# Altium PCB pcb-rev1-env.PcbDoc (part 1 of 2)
Units mm, origin at the board's own origin, x right, y up, seen from the top; angles counter-clockwise.
Board outline 100 x 50 mm, 2 copper layers (Top Layer, Bottom Layer); 97 components, 95 nets, 368 pads, 249 vias.
Unrouted connection lines stored in the file: 77.
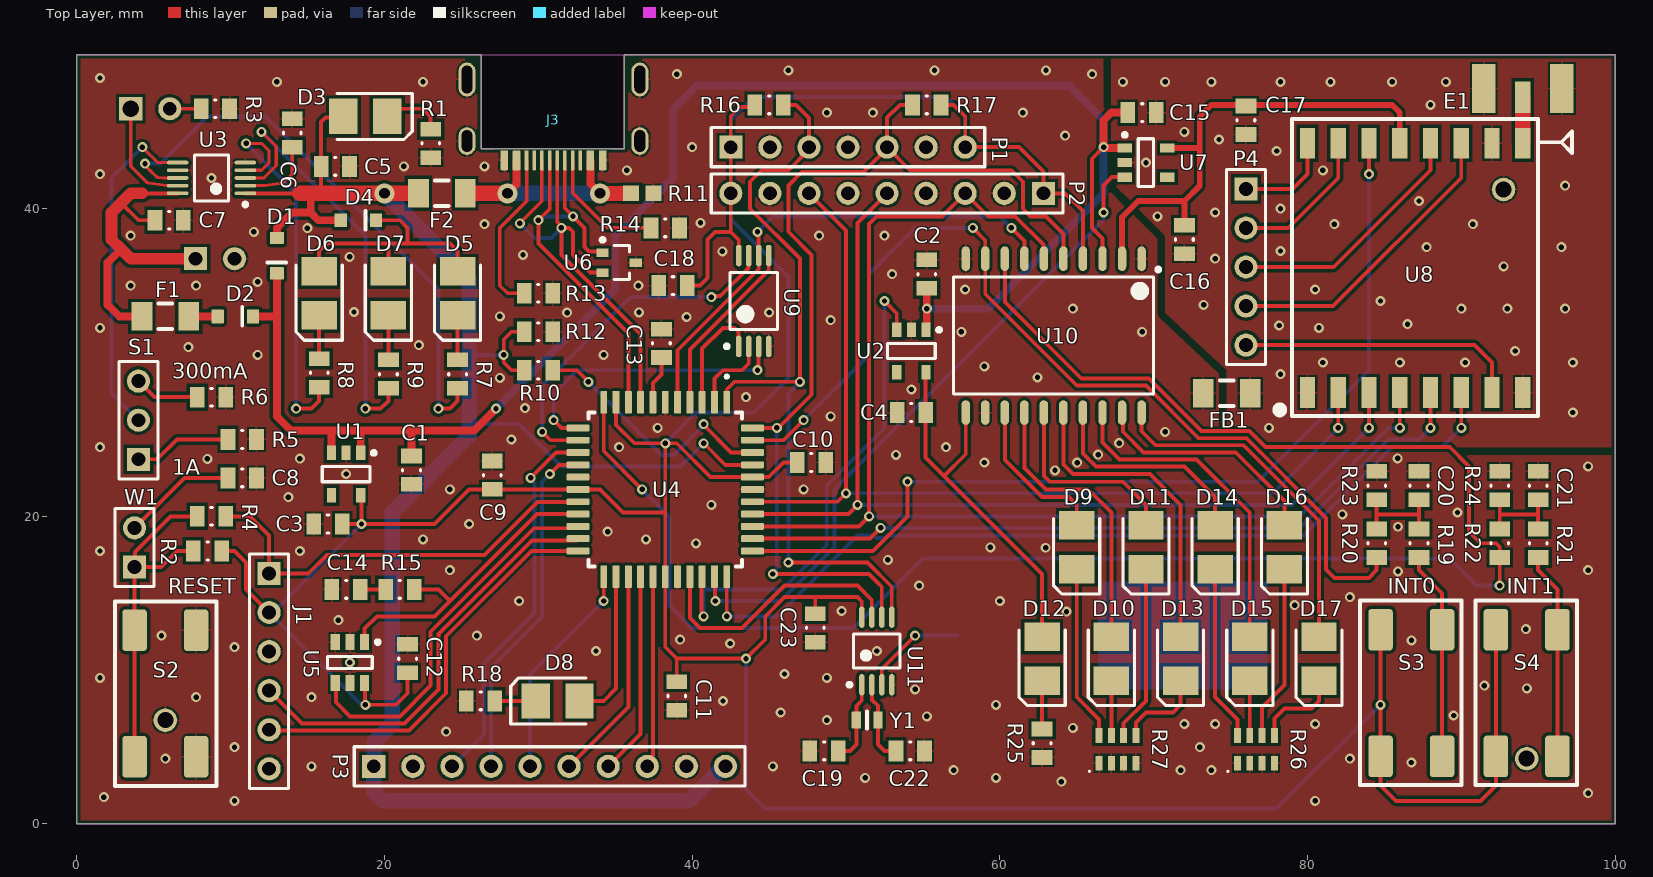
[diagram p0: Top Layer view]
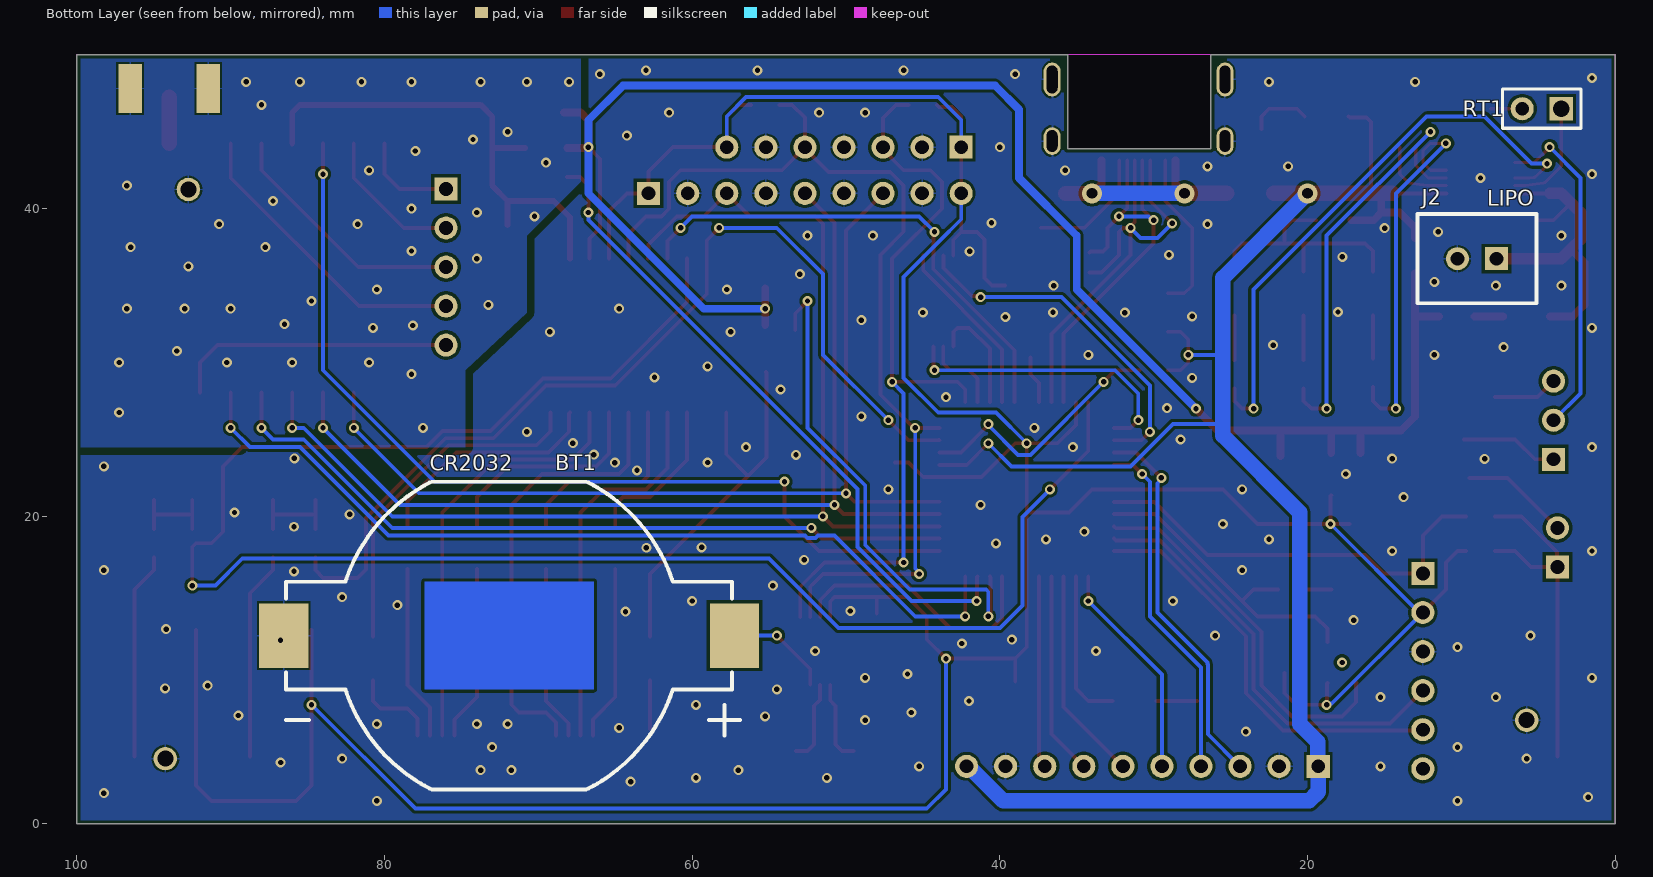
[diagram p1: Bottom Layer view, seen from below]

## Layer stack, top to bottom
Top Solder: solder mask 0.0102, Solder Resist, Dk 3.5
Top Layer: signal copper 0.0356
Dielectric 1: dielectric 0.32, FR-4, Dk 4.8
Bottom Layer: signal copper 0.0356
Bottom Solder: solder mask 0.0102, Solder Resist, Dk 3.5

## Board outline
0,0 0,50 26.3,50 26.3,43.9 35.6,43.9 35.6,50 100,50 100,0

## Design rules (kind name [scope] priority, off if disabled: settings)
BoardOutlineClearance [All] p1: gap=0.254 ignorepadtopadclearanceinfootprint=FALSE
Clearance "GND PLANE" [InNet('GND') vs InNet('SIG')] p1: gap=0.508 ignorepadtopadclearanceinfootprint=TRUE
Clearance [All] p2: gap=0.203 ignorepadtopadclearanceinfootprint=TRUE except(0.279: Arc-Hole Track-Hole SMDPad-Hole THPad-Hole Via-Hole Fill-Hole Poly-Hole Region-Hole Text-Hole)
ComponentClearance [All] p1: gap=0.127 collisioncheckmode=3 verticalgap=0.127 showdistances=TRUE
DiffPairsRouting [All] p1: maxlimit=0.254 minlimit=0.127 mostfreqgap=0.127 toplayer_minwidth=0.127 toplayer_maxwidth=25.4 toplayer_prefwidth=0.127 bottomlayer_minwidth=0.127 bottomlayer_maxwidth=25.4 bottomlayer_prefwidth=0.127 maxuncoupledlength=12.7
Height [All] p1: minheight=0 maxheight=1816.048 prefheight=12.7
HoleSize [All] p1: absolutevalues=TRUE maxlimit=6.1 minlimit=0.3 maxpercent=80.000 minpercent=20.000
HoleToHoleClearance [All] p1: gap=0.6 allowstackedmicrovias=FALSE
MinimumAnnularRing VIaAnnularRing [IsVia] p1: minimumring=0.145
MinimumAnnularRing [All] p2: minimumring=0.18
PlaneClearance [All] p1: clearance=0.127
PlaneConnect PlaneConnectPowerPads [InPadClass('PowerPads')] p1: planeconnectstyle=Direct reliefexpansion=0.508 reliefentries=4 reliefconductorwidth=0.254 reliefairgap=0.254
PlaneConnect [All] p2: pad.planeconnectstyle=Relief pad.reliefexpansion=0.3 pad.reliefentries=4 pad.reliefconductorwidth=0.127 pad.reliefairgap=0.127 via.planeconnectstyle=Direct via.reliefexpansion=0.3 via.reliefentries=4 via.reliefconductorwidth=0.127 via.reliefairgap=0.127
PolygonConnect PolygonConnectPowerPads [All vs (InPadClass('PowerPads'))] p1: connectstyle=Direct reliefconductorwidth=0.254 reliefentries=4 polygonreliefangle="90 Angle" airgapwidth=0.254
PolygonConnect [All] p2: thpad.connectstyle=Relief thpad.reliefconductorwidth=0.127 thpad.reliefentries=4 thpad.polygonreliefangle="90 Angle" thpad.airgapwidth=0.127 smdpad.connectstyle=Relief smdpad.reliefconductorwidth=0.127 smdpad.reliefentries=4 smdpad.polygonreliefangle="90 Angle" smdpad.airgapwidth=0.127 via.connectstyle=Direct via.reliefconductorwidth=0.127 via.reliefentries=4 via.polygonreliefangle="90 Angle" via.airgapwidth=0.127
RoomDefinition EnviroMon-p1 [InComponentClass('EnviroMon-p1')] p1: confinementstyle=ConfineIn formatcopy=TRUE lockcomponents=FALSE outline -2.593,-3.533 225.905,-3.533 225.905,52.779 -2.593,52.779
RoutingVias [All] p1: holewidth=0.35 width=0.65 viastyle="Through Hole" minholewidth=0.35 minwidth=0.65 maxholewidth=2 maxwidth=2
SilkToSilkClearance [All] p1: silktosilkclearance=0
SilkToSolderMaskClearance [IsPad] p1: minsilkscreentomaskgap=0.16 clearancetoexposedcopper=TRUE
SolderMaskExpansion [All] p1: expansion=0.075 istentingtop=FALSE
UnRoutedNet [All] p1: checkbadconnections=TRUE
Width [All] p1: maxlimit=25.4 minlimit=0.203 preferedwidth=0.254 minimp=50.000000 maximp=50.000000 favimp=50.000000
20 further rules are at their usual default settings.

## Classes and differential pairs
component class EnviroMon-p1: BT1 C1 C2 C3 C4 C5 C6 C7 C8 C9 C10 C11 C13 C14 C15 C17 C19 C20 C21 C22 C23 C? D1 D2 D3 D4 D5 D6 D7 D8 D9 D10 D11 D12 D13 D14 D15 D16 D17 E1 F1 F2 F? FB1 FB? J1 J2 J3 P1 P3 P4 R1 R3 R7 R9 R10 R11 R12 R13 R14 R15 R16 R18 R23 R24 R25 R26 R27 R? RT1 S1 S2 S3 S4 U1 U2 U3 U4 U6 U7 U8 U9 U10 U11 U? W1 Y1

## Components (designator, comment, footprint, x,y, rotation, side; value= is the part's Value field where it differs from the comment)
BT1 "BU2032SM-HD-G" BAT_BU2032SM-HD-G 71.9,12.25 r0 bottom locked
C1 "Cap" 0805 21.75,23 r90 top locked value=1u
C2 "Cap" 0805 55.25,35.75 r270 top locked value=1u
C3 "Cap" 0805 16.325,19.5 r0 top locked value=1u
C4 "Cap" 0805 54.25,26.75 r0 top locked value=1u
C5 "Cap" 0805 16.8,42.75 r180 top locked value=4.7u
C6 "Cap" 0805 14,44.925 r270 top locked value=4.7u
C7 "Cap" 0805 6,39.25 r180 top locked value=4.7u
C8 "Cap" 0805 10.75,22.5 r180 top locked value=0.1u
C9 "Cap" 0805 27,22.675 r90 top locked value=0.1u
C10 "Cap" 0805 47.75,23.5 r0 top locked value=0.1u
C11 "Cap" 0805 39,8.325 r90 top locked value=0.1u
C12 "Cap" 0805 21.5,10.75 r90 top locked value=2.2u
C13 "Cap" 0805 38,31.25 r270 top locked value=10u
C14 "Cap" 0805 17.5,15.25 r180 top locked value=2.2u
C15 "Cap" 0805 69.25,46.25 r180 top locked value=1u
C16 "Cap" 0805 72,38 r90 top locked value=1u
C17 "Cap" 0805 76,45.75 r90 top locked value=10u
C18 "Cap" 0805 38.75,35 r0 top locked value=0.1u
C19 "Cap" 0805 48.575,4.75 r0 top locked value=???
C20 "Cap" 0805 87.25,22 r90 top locked value=10n
C21 "Cap" 0805 95,22 r90 top locked value=10n
C22 "Cap" 0805 54.175,4.75 r180 top locked value=???
C23 "Cap" 0805 48,12.75 r90 top locked value=0.1u
D1 "Schottky Diode" "DIODE SOD323" 13,37 r90 top locked
D2 "Schottky Diode" "DIODE SOD323" 10.25,33 r180 top locked
D3 "CYN" "LED PLCC2" 18.75,46 r0 top locked
D4 "Schottky Diode" "DIODE SOD323" 18.25,39.25 r180 top locked
D5 "CYN" "LED PLCC2" 24.75,34.5 r270 top locked
D6 "GRN" "LED PLCC2" 15.75,34.5 r270 top locked
D7 "ORN" "LED PLCC2" 20.25,34.5 r270 top locked
D8 "RED" "LED PLCC2" 31.25,8 r180 top locked
D9 "RED" "LED PLCC2" 65,18 r270 top locked
D10 "RED" "LED PLCC2" 67.25,10.75 r270 top locked
D11 "RED" "LED PLCC2" 69.5,18 r270 top locked
D12 "RED" "LED PLCC2" 62.75,10.75 r270 top locked
D13 "RED" "LED PLCC2" 71.75,10.75 r270 top locked
D14 "RED" "LED PLCC2" 74,18 r270 top locked
D15 "RED" "LED PLCC2" 76.25,10.75 r270 top locked
D16 "RED" "LED PLCC2" 78.5,18 r270 top locked
D17 "RED" "LED PLCC2" 80.75,10.75 r270 top locked
E1 "SMA connector" SMA 94.02,48.746 r0 top locked
F1 "0.5A Fuse" 1206 5.75,33 r0 top locked
F2 "1.5A Fuse" 1206 23.725,41 r0 top locked
FB1 "Ferrite Bead" 1206 74.75,28 r0 top locked
J1 "ICSP" HDR1X6 12.5,16.29 r270 top locked
J2 "JST-PH" JST-PH 7.71,36.75 r0 bottom locked
J3 "USB C Receptable" USB4510-03-1-A 30.98,50 r180 top locked
P1 "Header 7" HDR1X7 42.51,44 r0 top locked
P2 "Header 9" HDR1X9 62.83,41 r180 top locked
P3 "Header 10" HDR1X10 19.3,3.75 r0 top locked
P4 "Header 5" HDR1X5 76,41.29 r270 top locked
R1 "Res1" 0805 23,44.25 r270 top locked value=1k
R2 "Res1" 0805 8.5,17.75 r0 top locked value=10k
R3 "Res1" 0805 9,46.5 r180 top locked value=???
R4 "Res1" 0805 8.75,20 r180 top locked value=470
R5 "Res1" 0805 10.75,25 r0 top locked value=1k
R6 "Res1" 0805 8.75,27.75 r0 top locked value=3.3k
R7 "Res1" 0805 24.75,29.25 r90 top locked value=1k
R8 "Res1" 0805 15.75,29.325 r90 top locked value=1k
R9 "Res1" 0805 20.25,29.25 r90 top locked value=1k
R10 "Res1" 0805 30,29.5 r180 top locked value=100k
R11 "Varistor" 0603 36.75,41 r0 top locked
R12 "Res1" 0805 30,32 r0 top locked value=100k
R13 "Res1" 0805 30,34.5 r0 top locked value=5.1k
R14 "Res1" 0805 38.25,38.75 r180 top locked value=5.1k
R15 "Res1" 0805 21,15.25 r0 top locked value=50
R16 "Res1" 0805 45,46.75 r0 top locked value=4.7k
R17 "Res1" 0805 55.25,46.75 r180 top locked value=4.7k
R18 "Res1" 0805 26.25,8 r0 top locked value=???
R19 "Res1" 0805 87.25,18.25 r270 top locked value=???
R20 "Res1" 0805 84.5,18.25 r270 top locked value=???
R21 "Res1" 0805 95,18.25 r270 top locked value=???
R22 "Res1" 0805 92.5,18.25 r90 top locked value=???
R23 "Res1" 0805 84.5,22 r90 top locked value=75k
R24 "Res1" 0805 92.5,22 r90 top locked value=75k
R25 "Res1" 0805 62.75,5.25 r90 top locked value=???
R26 "Res1" "1206 ARRAY" 76.65,4.85 r90 top locked value=1k
R27 "Res1" "1206 ARRAY" 67.65,4.85 r90 top locked value=1k
RT1 "Thermistor" HDR1X2#1 3.5,46.5 r0 bottom locked
S1 "SW-SPDT" HDR1X3 4,23.71 r90 top locked
S2 "SW-PB" "SM KT SWITCH" 5.75,8.5 r270 top locked
S3 "SW-PB" "SM KT SWITCH" 86.75,8.5 r90 top locked
S4 "SW-PB" "SM KT SWITCH" 94.25,8.5 r90 top locked
U1 "2.8V Regulator" "REGULATOR SOT25(3?)" 17.5,22.75 r270 top locked
U2 "2.8V Regulator" "REGULATOR SOT25(3?)" 54.25,30.75 r270 top locked
U3 "LiPo Charge Controller" "LIPO MSOP" 8.75,42 r180 top locked
U4 "Main Microcontroller" PIC24FJ64GB004T-I/PT 38.25,21.75 r270 top locked
U5 "Precision Voltage Reference" "VREF SOT23-6" 17.75,10.5 r270 top locked
U6 "TVS Diode" "TVS SOT23-3" 35.25,36.5 r0 top locked
U7 "2.8V Regulator" "REGULATOR SOT25(3?)" 69.5,43 r0 top locked
U8 "RFM95 Transceiver" RFM95 87.4,36.223 r90 top locked
U9 "512kb EEPROM" "EEPROM 8TSSOP" 44,34 r90 top locked
U10 "Octal Buffer" "OCTAL BUFFER SOIC" 63.5,31.75 r270 top locked
U11 "RTC" "RTC 8MSOP" 52,11.25 r90 top locked
W1 "Jumper" HDR1X2#2 3.75,16.71 r90 top locked
Y1 "32.768kHz" CRYSTAL 51.373,6.759 r180 top locked

## Footprints (in the part's own frame and the unit in brackets; to place one, negate y for a bottom-side part, rotate by r counter-clockwise, add the part's x,y. Pads: shape width x height; smd on the part's side, far side on the other; paste and mask are expansions set on the pad)
0603 [mm]
  rect 1.05x1 smd: 1(-0.725,0) 2(0.725,0)
  body extent -0.9,-0.5 0.9,0.5, height 1
0805 [mm] "Chip Resistor, 2-Leads, Body 2.00x1.25mm, IPC Medium Density"
  rect 0.95x1.35 smd: 1(-0.925,0) 2(0.925,0)
  silkscreen extent -0.05,-0.58 0.05,0.58, body extent -1.05,-0.67 1.05,0.67, height 0.65
1206 [mm] "Chip Resistor, 2-Leads, Body 3.10x1.60mm, IPC Low Density"
  rect 1.35x1.85 smd: 1(-1.525,0) 2(1.525,0)
  silkscreen extent -0.45,-0.82 0.45,0.82, body extent -1.6,-0.85 1.6,0.85, height 0.65
"1206 ARRAY" [mm] "Chip Array, Flat, 8-Leads, Pitch 0.80mm,  Body 3.20x1.60mm,  IPC Medium Density"
  rect 0.95x0.45 smd: 1(-0.9,1.2) 2(-0.9,0.4) 3(-0.9,-0.4) 4(-0.9,-1.2) 5(0.9,-1.2) 6(0.9,-0.4) 7(0.9,0.4) 8(0.9,1.2)
  silkscreen extent -1.47,1.78 -1.37,1.88, body extent -0.9,-1.68 0.9,1.68, height 1
BAT_BU2032SM-HD-G [mm]
  rect 3.2x4.2 smd: NEG(14.65,0) POS(-14.65,0)
  Top Layer region: 5.5,-3.5 -5.5,-3.5 -5.5,3.5 5.5,3.5
  silkscreen extent -15,-10 14.5,10
CRYSTAL [mm]
  rrect10% 0.6x1.1 smd: 1(-0.7,0) 2(0.7,0)
  silkscreen extent 0,-0.55 0,0.55
"DIODE SOD323" [mm]
  rrect10% 0.8x0.9 smd: 1(-1.2,0) 2(1.1,0)
  silkscreen extent -0.5,-0.6 -0.5,0.6
"EEPROM 8TSSOP" [mm]
  oval 1.4x0.38 smd: 1(-2.95,0.975) 2(-2.95,0.325) 3(-2.95,-0.325) 4(-2.95,-0.975) 5(2.95,-0.975) 6(2.95,-0.325) 7(2.95,0.325) 8(2.95,0.975)
  silkscreen extent -3.07,-1.55 1.85,1.87, body extent -2.25,-1.55 2.25,1.55, height 1.2
HDR1X2#1 [mm] "Connector; Header; 2 Position"
  rect 1.5x1.5 hole 1.05: 1(0,0)
  round 1.5 hole 0.9: 2(2.54,0)
  silkscreen extent -1.27,-1.27 3.81,1.27
HDR1X2#2 [mm] "Connector; Header; 2 Position"
  rect 1.5x1.5 hole 0.9: 1(0,0)
  round 1.5 hole 0.9: 2(2.54,0)
  silkscreen extent -1.27,-1.27 3.81,1.27
HDR1X3 [mm] "Connector; Header; 3 Position"
  rect 1.5x1.5 hole 0.9: 1(0,0)
  round 1.5 hole 0.9: 2(2.54,0) 3(5.08,0)
  silkscreen extent -1.27,-1.27 6.35,1.27
HDR1X5 [mm] "Connector; Header; 5 Position"
  rect 1.5x1.5 hole 0.9: 1(0,0)
  round 1.5 hole 0.9: 2(2.54,0) 3(5.08,0) 4(7.62,0) 5(10.16,0)
  silkscreen extent -1.27,-1.27 11.43,1.27
HDR1X6 [mm] "Connector; Header; 6 Position"
  rect 1.5x1.5 hole 0.9: 1(0,0)
  round 1.5 hole 0.9: 2(2.54,0) 3(5.08,0) 4(7.62,0) 5(10.16,0) 6(12.7,0)
  silkscreen extent -1.27,-1.27 13.97,1.27
HDR1X7 [mm] "Connector; Header; 7 Position"
  rect 1.5x1.5 hole 0.9: 1(0,0)
  round 1.5 hole 0.9: 2(2.54,0) 3(5.08,0) 4(7.62,0) 5(10.16,0) 6(12.7,0) 7(15.24,0)
  silkscreen extent -1.27,-1.27 16.51,1.27
HDR1X9 [mm] "Connector; Header; 9 Position"
  rect 1.5x1.5 hole 0.9: 1(0,0)
  round 1.5 hole 0.9: 2(2.54,0) 3(5.08,0) 4(7.62,0) 5(10.16,0) 6(12.7,0) 7(15.24,0) 8(17.78,0) 9(20.32,0)
  silkscreen extent -1.27,-1.27 21.59,1.27
HDR1X10 [mm] "Connector; Header; 10 Position"
  rect 1.5x1.5 hole 0.9: 1(0,0)
  round 1.5 hole 0.9: 2(2.54,0) 3(5.08,0) 4(7.62,0) 5(10.16,0) 6(12.7,0) 7(15.24,0) 8(17.78,0) 9(20.32,0) 10(22.86,0)
  silkscreen extent -1.27,-1.27 24.13,1.27
JST-PH [mm]
  rect 1.5x1.5 hole 0.9: 1(0,0)
  round 1.5 hole 0.9: 2(2.54,0)
  silkscreen extent -2.59,-2.9 5.13,2.9
"LED PLCC2" [mm] "Molded Diode, 2-Leads, Body 3.50x2.80mm, IPC Medium Density"
  rect 1.85x2.3 smd: 1(-1.425,0) 2(1.425,0)
  silkscreen extent -1.85,-1.5 3.05,1.5, body extent -1.85,-1.5 1.85,1.5, height 1.9
"LIPO MSOP" [mm] "TSSOP, 10-Leads, Body 3.00x3.00mm, Pitch 0.50mm, IPC Medium Density"
  oval 1.4x0.245 smd: 1(-2.2,1) 2(-2.2,0.5) 3(-2.2,0) 4(-2.2,-0.5) 5(-2.2,-1) 6(2.2,-1) 7(2.2,-0.5) 8(2.2,0) 9(2.2,0.5) 10(2.2,1)
  silkscreen extent -2.33,-1.5 1.1,1.85, body extent -1.5,-1.5 1.5,1.5, height 1.1
"OCTAL BUFFER SOIC" [mm] "SOIC, 20-Leads, Body 12.80x7.50mm, Pitch 1.27mm, IPC Medium Density"
  oval 1.6x0.55 smd: 1(-5,5.715) 2(-5,4.445) 3(-5,3.175) 4(-5,1.905) 5(-5,0.635) 6(-5,-0.635) 7(-5,-1.905) 8(-5,-3.175) 9(-5,-4.445) 10(-5,-5.715) 11(5,-5.715) 12(5,-4.445) 13(5,-3.175) 14(5,-1.905) 15(5,-0.635) 16(5,0.635) 17(5,1.905) 18(5,3.175) 19(5,4.445) 20(5,5.715)
  silkscreen extent -4.42,-6.5 3.8,6.93, body extent -3.8,-6.5 3.8,6.5, height 2.65
PIC24FJ64GB004T-I/PT [mm]
  rrect25% 1.47x0.45 smd: 1(-5.67,4) 2(-5.67,3.2) 3(-5.67,2.4) 4(-5.67,1.6) 5(-5.67,0.8) 6(-5.67,0) 7(-5.67,-0.8) 8(-5.67,-1.6) 9(-5.67,-2.4) 10(-5.67,-3.2) 11(-5.67,-4) 23(5.67,-4) 24(5.67,-3.2) 25(5.67,-2.4) 26(5.67,-1.6) 27(5.67,-0.8) 28(5.67,0) 29(5.67,0.8) 30(5.67,1.6) 31(5.67,2.4) 32(5.67,3.2) 33(5.67,4)
  rrect25% 0.45x1.47 smd: 12(-4,-5.67) 13(-3.2,-5.67) 14(-2.4,-5.67) 15(-1.6,-5.67) 16(-0.8,-5.67) 17(0,-5.67) 18(0.8,-5.67) 19(1.6,-5.67) 20(2.4,-5.67) 21(3.2,-5.67) 22(4,-5.67) 34(4,5.67) 35(3.2,5.67) 36(2.4,5.67) 37(1.6,5.67) 38(0.8,5.67) 39(0,5.67) 40(-0.8,5.67) 41(-1.6,5.67) 42(-2.4,5.67) 43(-3.2,5.67) 44(-4,5.67)
  silkscreen extent -7.44,-5 5,5, body extent -6,-6 6,6, height 1.2
"REGULATOR SOT25(3?)" [mm] "SOT23, 5-Leads, Body 2.90x2.75mm, Pitch 0.95mm, IPC Medium Density"
  rect 0.95x0.6 smd: 1(-1.375,0.95) 2(-1.375,0) 3(-1.375,-0.95) 4(1.375,-0.95) 5(1.375,0.95)
  silkscreen extent -1.5,-1.55 0.5,1.93, body extent -0.9,-1.55 0.9,1.55, height 1.3
RFM95 [mm]
  rect 2x1 smd: 1(-8.173,7.4) 2(-8.173,5.4) 3(-8.173,3.4) 4(-8.173,1.4) 5(-8.173,-0.6) 6(-8.173,-2.6) 7(-8.173,-4.6) 8(-8.173,-6.6) 9(8.027,-6.6) 10(8.027,-4.6) 11(8.027,-2.6) 12(8.027,-0.6) 13(8.027,1.4) 14(8.027,3.4) 15(8.027,5.4) 16(8.027,7.4)
  silkscreen extent -9.7,-9.8 9.6,9.3, body extent -8.13,-7.44 8.05,8.31, height 1.1
"RTC 8MSOP" [mm]
  oval 1.4x0.35 smd: 1(-2.2,0.975) 2(-2.2,0.325) 3(-2.2,-0.325) 4(-2.2,-0.975) 5(2.2,-0.975) 6(2.2,-0.325) 7(2.2,0.325) 8(2.2,0.975)
  silkscreen extent -2.32,-1.5 1.1,1.9, body extent -1.1,-1.5 1.1,1.5, height 1.1
"SM KT SWITCH" [mm]
  rrect25% 2.7x1.59 smd: 1-2(-4.1,2) 1-2(4.125,2) 3-4(-4.1,-2) 3-4(4.125,-2)
  silkscreen extent -5.97,-3.27 6.02,3.32
SMA [mm]
  rect 1.016x2.032 smd paste+0: ANT(-0.02,-1.496)
  rect 1.524x3.164 smd paste+0: GND(-2.56,-0.93) GND(2.52,-0.93)
  rect 1.524x3.164 smd far side paste+0: GND(-2.56,-0.93) GND(2.52,-0.93)
"TVS SOT23-3" [mm]
  rect 0.8x0.55 smd: 1(-1.075,0.65) 2(-1.075,-0.65) 3(1.075,0)
  silkscreen extent -1.2,-1.1 0.67,1.6, body extent -0.67,-1.1 0.67,1.1, height 1
USB4510-03-1-A [mm]
  rrect25% 0.5x1.3 smd: A1-B12(-3.2,6.85) A4-B9(-2.4,6.85) B1-A12(3.2,6.85) B4-A9(2.4,6.85)
  rrect25% 0.23x1.3 smd: A5(-1.25,6.85) A6(-0.25,6.85) A7(0.25,6.85) A8(1.25,6.85) B5(1.75,6.85) B6(0.75,6.85) B7(-0.75,6.85) B8(-1.75,6.85)
  rrect100% 1.1x1.8 hole 0.7 slot 1.4 at 90 deg: SHELL(-5.62,5.6) SHELL(5.62,5.6)
  rrect100% 1.1x2.2 hole 0.7 slot 1.8 at 90 deg: SHELL(-5.62,1.6) SHELL(5.62,1.6)
"VREF SOT23-6" [mm]
  rect 1.05x0.6 smd: 1(-1.325,0.95) 2(-1.325,0) 3(-1.325,-0.95) 4(1.325,-0.95) 5(1.325,0) 6(1.325,0.95)
  silkscreen extent -1.45,-1.45 0.4,1.93, body extent -0.8,-1.45 0.8,1.45, height 1.3

## Part data
BT1: "BATTERY HOLDER COIN 20MM SMD", Package=None, Availability=Unavailable, MF="MPD _Memory", MP=BU2032SM-HD-G, Price=None, SnapEDA_Link=https://www.snapeda.com/parts/BU2032SM-HD-G/MPD%20%28Memory%20Protection%20Devices%29/view-part/4219667/?ref=snap
C1 C2 C3 C4 C15 C16: library part "cap 1u", "Capacitor", LatestRevisionDate=17-Jul-2002, LatestRevisionNote="Re-released for DXP Platform.", PackageDescription="Radial Cap, Thru-Hole; 2 Leads; 0.3 in Pin Spacing", PackageReference=RAD-0.3, Published=8-Jun-2000, Publisher="Altium Limited"
C5 C6 C7: library part "cap 4.7u", "Capacitor", LatestRevisionDate=17-Jul-2002, LatestRevisionNote="Re-released for DXP Platform.", PackageDescription="Radial Cap, Thru-Hole; 2 Leads; 0.3 in Pin Spacing", PackageReference=RAD-0.3, Published=8-Jun-2000, Publisher="Altium Limited"
C8 C9 C10 C11 C18 C23: library part "cap 0.1u", "Capacitor", LatestRevisionDate=17-Jul-2002, LatestRevisionNote="Re-released for DXP Platform.", PackageDescription="Radial Cap, Thru-Hole; 2 Leads; 0.3 in Pin Spacing", PackageReference=RAD-0.3, Published=8-Jun-2000, Publisher="Altium Limited"
C12 C14: library part "cap 2.2u", "Capacitor", LatestRevisionDate=17-Jul-2002, LatestRevisionNote="Re-released for DXP Platform.", PackageDescription="Radial Cap, Thru-Hole; 2 Leads; 0.3 in Pin Spacing", PackageReference=RAD-0.3, Published=8-Jun-2000, Publisher="Altium Limited"
C13 C17: library part "cap 10u", "Capacitor", LatestRevisionDate=17-Jul-2002, LatestRevisionNote="Re-released for DXP Platform.", PackageDescription="Radial Cap, Thru-Hole; 2 Leads; 0.3 in Pin Spacing", PackageReference=RAD-0.3, Published=8-Jun-2000, Publisher="Altium Limited"
C19 C22: library part "cap ???", "Capacitor", LatestRevisionDate=17-Jul-2002, LatestRevisionNote="Re-released for DXP Platform.", PackageDescription="Radial Cap, Thru-Hole; 2 Leads; 0.3 in Pin Spacing", PackageReference=RAD-0.3, Published=8-Jun-2000, Publisher="Altium Limited"
C20 C21: library part "cap 10n", "Capacitor", LatestRevisionDate=17-Jul-2002, LatestRevisionNote="Re-released for DXP Platform.", PackageDescription="Radial Cap, Thru-Hole; 2 Leads; 0.3 in Pin Spacing", PackageReference=RAD-0.3, Published=8-Jun-2000, Publisher="Altium Limited"
D1 D2 D4: library part CUS08F30,H3F, "Rectifier Diode Small Signal Schottky Si 0.8A 2-Pin USC T/R", Average Rectified Current=800mA, Case/Package=SOD, Manufacturer=Toshiba, Max Operating Temperature=125°C, Max Repetitive Reverse Voltage (Vrrm)=30V, Max Reverse Current=50uA, Min Operating Temperature=-55°C, Peak Non-Repetitive Surge Current=5A, Supplier Part Number 1=CUS08F30H3FCT-ND, Category="Rectifier Diodes", ComponentLink1Description=http://toshiba.semicon-storage.com/info/docget.jsp?type=datasheet&lang=en&pid=CUS08F30&src-supplier=Avnet, ComponentLink1URL=http://toshiba.semicon-storage.com/info/docget.jsp?type=datasheet&lang=en&pid=CUS08F30&src-supplier=Avnet, ComponentLink2Description=http://toshiba.semicon-storage.com/info/lookup.jsp?pid=CUS08F30&amp;lang=en&src-supplier=Mouser, ComponentLink2URL=http://toshiba.semicon-storage.com/info/lookup.jsp?pid=CUS08F30&amp;lang=en&src-supplier=Mouser, ComponentLink3Description=https://toshiba.semicon-storage.com/info/docget.jsp?did=9019&prodName=CUS08F30&src-supplier=Digi-Key, ComponentLink3URL=https://toshiba.semicon-storage.com/info/docget.jsp?did=9019&prodName=CUS08F30&src-supplier=Digi-Key, Contact Plating=Tin,Silver, Element Configuration=Single, Manufacturer Part Number=CUS08F30,H3F, Max Reverse Voltage (DC)=30V, Mount="Surface Mount", Number of Pins=2, Packaging="Tape and Reel", Pricing 1="1=0.35000, 10=0.28400, 100=0.15050, 500=0.09900, 1000=0.06732 (USD)", RoHS=Yes, RoHS Compliant=Yes, Supplier 1=Digi-Key
D3 D5: library part LED-CYAN, "CYAN LED", LatestRevisionDate=08-Jul-2005, LatestRevisionNote="Mech Layer 1 removed.", PackageDescription="LED; 2 Leads", PackageReference=LED-1, Published=8-Jun-2000, Publisher="Altium Limited"
D6: library part LED-GREEN, "Green LED", LatestRevisionDate=08-Jul-2005, LatestRevisionNote="Mech Layer 1 removed.", PackageDescription="LED; 2 Leads", PackageReference=LED-1, Published=8-Jun-2000, Publisher="Altium Limited"
D7: library part LED-ORANGE, "Orange LED", LatestRevisionDate=08-Jul-2005, LatestRevisionNote="Mech Layer 1 removed.", PackageDescription="LED; 2 Leads", PackageReference=LED-1, Published=8-Jun-2000, Publisher="Altium Limited"
D8 D9 D10 D11 D12 D13 D14 D15 D16 D17: library part LED-RED, "Red LED", LatestRevisionDate=08-Jul-2005, LatestRevisionNote="Mech Layer 1 removed.", PackageDescription="LED; 2 Leads", PackageReference=LED-1, Published=8-Jun-2000, Publisher="Altium Limited"
E1: "Generic Antenna", LatestRevisionDate=17-Jul-2002, LatestRevisionNote="Re-released for DXP Platform.", PackageReference=PIN1, Published=24-Mar-1999, Publisher="Altium Limited"
F1: library part NANOSMDC050F/13.2-2, "PTC Resettable Fuse 0.5A(hold) 1.1A(trip) 13.2VDC 100A 0.8W 0.1s 0.2Ohm SMD Solder Pad 1206 T/R Automotive", Case Code (Imperial)=1206, Case Code (Metric)=3216, Hold Current=500mA, Manufacturer=Littelfuse, Max Current Rating=100A, Max Operating Temperature=85°C, Min Operating Temperature=-40°C, Supplier Part Number 1=NANOSMDC050F/13.2-2CT-ND, Trip Current=1.1A, Voltage Rating (DC)=13.2V, Approvals=UL,CSA,TUV, Category="PTC Resettable Fuses", ComponentLink1Description=http://www.farnell.com/datasheets/2282569.pdf?src-supplier=Farnell, ComponentLink1URL=http://www.farnell.com/datasheets/2282569.pdf?src-supplier=Farnell, ComponentLink2Description=http://www.farnell.com/cad/1650136.pdf?src-supplier=Element14, ComponentLink2URL=http://www.farnell.com/cad/1650136.pdf?src-supplier=Element14, ComponentLink3Description=http://www.farnell.com/datasheets/1468628.pdf?src-supplier=Element14, ComponentLink3URL=http://www.farnell.com/datasheets/1468628.pdf?src-supplier=Element14, ComponentLink4Description=http://www.farnell.com/datasheets/2282569.pdf?src-supplier=Newark, ComponentLink4URL=http://www.farnell.com/datasheets/2282569.pdf?src-supplier=Newark, ComponentLink5Description=http://www.littelfuse.com/~/media/electronics/datasheets/resettable_ptcs/littelfuse_ptc_nanosmd_catalog_datasheet.pdf.pdf?src-supplier=Digi-Key, ComponentLink5URL=http://www.littelfuse.com/~/media/electronics/datasheets/resettable_ptcs/littelfuse_ptc_nanosmd_catalog_datasheet.pdf.pdf?src-supplier=Digi-Key, ComponentLink6Description=https://www.littelfuse.com/~/media/electronics/product_specifications/resettable_ptcs/littelfuse_ptc_nanosmdc050f_13_2_2_product_specification.pdf.pdf?src-supplier=Digi-Key, ComponentLink6URL=https://www.littelfuse.com/~/media/electronics/product_specifications/resettable_ptcs/littelfuse_ptc_nanosmdc050f_13_2_2_product_specification.pdf.pdf?src-supplier=Digi-Key, Length=3.4mm, Manufacturer Part Number=NANOSMDC050F/13.2-2, Packaging="Tape and Reel", Pricing 1="1=0.46000, 5=0.44800, 10=0.43400, 50=0.36520, 100=0.30320, 250=0.27560, 500=0.23426, 1000=0.20670 (USD)", REACH SVHC=Unknown, RoHS=Yes, Stock 1=36978, Supplier 1=Digi-Key, Time to Trip=100ms
F2: library part NANOSMDC150F-2, "PTC Resettable Fuse 1.5A(hold) 3A(trip) 6VDC 100A 0.8W 0.3s 0.04Ohm SMD Solder Pad 1206 T/R", Hold Current=1.5A, Manufacturer=Littelfuse, Max Operating Temperature=85°C, Min Operating Temperature=-40°C, Supplier Part Number 1=NANOSMDC150F-2CT-ND, Voltage Rating (DC)=6V, Category="PTC Resettable Fuses", ComponentLink1Description=http://www.farnell.com/datasheets/2282569.pdf?src-supplier=Farnell, ComponentLink1URL=http://www.farnell.com/datasheets/2282569.pdf?src-supplier=Farnell, ComponentLink2Description=http://www.farnell.com/cad/1650137.pdf?src-supplier=Element14, ComponentLink2URL=http://www.farnell.com/cad/1650137.pdf?src-supplier=Element14, ComponentLink3Description=http://www.farnell.com/datasheets/1468628.pdf?src-supplier=Element14, ComponentLink3URL=http://www.farnell.com/datasheets/1468628.pdf?src-supplier=Element14, ComponentLink4Description=http://www.farnell.com/datasheets/2282569.pdf?src-supplier=Newark, ComponentLink4URL=http://www.farnell.com/datasheets/2282569.pdf?src-supplier=Newark, ComponentLink5Description=https://www.littelfuse.com/~/media/electronics/product_specifications/resettable_ptcs/littelfuse_ptc_nanosmdc150f_2_product_specification.pdf.pdf?src-supplier=Digi-Key, ComponentLink5URL=https://www.littelfuse.com/~/media/electronics/product_specifications/resettable_ptcs/littelfuse_ptc_nanosmdc150f_2_product_specification.pdf.pdf?src-supplier=Digi-Key, ComponentLink6Description=http://www.littelfuse.com/~/media/electronics/datasheets/resettable_ptcs/littelfuse_ptc_nanosmd_catalog_datasheet.pdf.pdf?src-supplier=Digi-Key, ComponentLink6URL=http://www.littelfuse.com/~/media/electronics/datasheets/resettable_ptcs/littelfuse_ptc_nanosmd_catalog_datasheet.pdf.pdf?src-supplier=Digi-Key, Manufacturer Part Number=NANOSMDC150F-2, Pricing 1="1=0.46000, 5=0.44800, 10=0.43400, 50=0.36520, 100=0.30320, 250=0.27560, 500=0.23426, 1000=0.20670 (USD)", REACH SVHC=Unknown, RoHS=Yes, RoHS Compliant=Yes, Stock 1=5334, Supplier 1=Digi-Key
FB1: library part "ferrite bead"
J1: library part "ICSP header"
J2: "Input/Output"
J3: library part USB4510-03-1-A, "USB Type C Receptacle for USB 2.0, SMT Type Mid Mount, 1.6mm Offset", Manufacturer="Global Connector Technology", Supplier Part Number 1=2073-USB4510-03-1-ATR-ND, Category=Uncategorized, Manufacturer Part Number=USB4510-03-1-A, RoHS=No, Supplier 1=Digi-Key
P1: "Header, 7-Pin", LatestRevisionDate=17-Jul-2002, LatestRevisionNote="Re-released for DXP Platform.", Publisher="Altium Limited"
P2: "Header, 9-Pin", LatestRevisionDate=17-Jul-2002, LatestRevisionNote="Re-released for DXP Platform.", Publisher="Altium Limited"
P3: "Header, 10-Pin", LatestRevisionDate=17-Jul-2002, LatestRevisionNote="Re-released for DXP Platform.", Publisher="Altium Limited"
P4: "Header, 5-Pin", LatestRevisionDate=17-Jul-2002, LatestRevisionNote="Re-released for DXP Platform.", Publisher="Altium Limited"
R1 R5 R7 R8 R9: library part "resistor 1k", "Resistor", LatestRevisionDate=17-Jul-2002, LatestRevisionNote="Re-released for DXP Platform.", PackageDescription="Axial Device, Thru-Hole; 2 Leads; 0.3 in Pin Spacing", PackageReference=AXIAL-0.3, Published=8-Jun-2000, Publisher="Altium Limited"
R2: library part "resistor 10k", "Resistor", LatestRevisionDate=17-Jul-2002, LatestRevisionNote="Re-released for DXP Platform.", PackageDescription="Axial Device, Thru-Hole; 2 Leads; 0.3 in Pin Spacing", PackageReference=AXIAL-0.3, Published=8-Jun-2000, Publisher="Altium Limited"
R3 R18 R19 R20 R21 R22 R25: library part "resistor ???", "Resistor", LatestRevisionDate=17-Jul-2002, LatestRevisionNote="Re-released for DXP Platform.", PackageDescription="Axial Device, Thru-Hole; 2 Leads; 0.3 in Pin Spacing", PackageReference=AXIAL-0.3, Published=8-Jun-2000, Publisher="Altium Limited"
R4: library part "resistor 470", "Resistor", LatestRevisionDate=17-Jul-2002, LatestRevisionNote="Re-released for DXP Platform.", PackageDescription="Axial Device, Thru-Hole; 2 Leads; 0.3 in Pin Spacing", PackageReference=AXIAL-0.3, Published=8-Jun-2000, Publisher="Altium Limited"
R6: library part "resistor 3.3k", "Resistor", LatestRevisionDate=17-Jul-2002, LatestRevisionNote="Re-released for DXP Platform.", PackageDescription="Axial Device, Thru-Hole; 2 Leads; 0.3 in Pin Spacing", PackageReference=AXIAL-0.3, Published=8-Jun-2000, Publisher="Altium Limited"
R10 R12: library part "resistor 100k", "Resistor", LatestRevisionDate=17-Jul-2002, LatestRevisionNote="Re-released for DXP Platform.", PackageDescription="Axial Device, Thru-Hole; 2 Leads; 0.3 in Pin Spacing", PackageReference=AXIAL-0.3, Published=8-Jun-2000, Publisher="Altium Limited"
R11: library part CG0603MLA-5.5ME, "Var MOV 4VAC/5.5VDC 30A 9.6V 0603 SMD Paper T/R", Capacitance=270pF, Case Code (Imperial)=0603, Case Code (Metric)=1608, Clamping Current=1A, Clamping Voltage=19V, Current Rating=30A, Manufacturer=Bourns, Max Operating Temperature=125°C, Max Varistor Voltage=9.6V, Max Voltage Rating (AC)=4V, Max Voltage Rating (DC)=5.5V, Min Operating Temperature=-55°C, Min Varistor Voltage=6.4V, Package Quantity=4000, Supplier Part Number 1=CG0603MLA-5.5MECT-ND, Tolerance=20%, Case/Package=0603, Category=Varistors, ComponentLink1Description=https://datasheet.ciiva.com/3023/mla-3023927.pdf?src-supplier=Avnet, ComponentLink1URL=https://datasheet.ciiva.com/3023/mla-3023927.pdf?src-supplier=Avnet, ComponentLink2Description=https://datasheet.ciiva.com/3023/mla-3023928.pdf?src-supplier=Avnet, ComponentLink2URL=https://datasheet.ciiva.com/3023/mla-3023928.pdf?src-supplier=Avnet, ComponentLink3Description=https://datasheet.ciiva.com/1283/1695374-1283138.pdf?src-supplier=Farnell, ComponentLink3URL=https://datasheet.ciiva.com/1283/1695374-1283138.pdf?src-supplier=Farnell, ComponentLink4Description=https://datasheet.ciiva.com/6992/mla-6992302.pdf?src-supplier=Digi-Key, ComponentLink4URL=https://datasheet.ciiva.com/6992/mla-6992302.pdf?src-supplier=Digi-Key, ComponentLink5Description=https://datasheet.ciiva.com/16957/mla-16957366.pdf?src-supplier=Avnet+Europe, ComponentLink5URL=https://datasheet.ciiva.com/16957/mla-16957366.pdf?src-supplier=Avnet+Europe, ComponentLink6Description=https://datasheet.ciiva.com/26819/getdatasheetpartid-171411-26819835.pdf?src-supplier=Verical, ComponentLink6URL=https://datasheet.ciiva.com/26819/getdatasheetpartid-171411-26819835.pdf?src-supplier=Verical, Contact Plating=Nickel, Depth=0.8mm, Energy=0.1J, Length=1mm, Manufacturer Part Number=CG0603MLA-5.5ME, Max Surge Current=30A, Mount="Surface Mount", Number of Channels=1, Number of Circuits=1, Operating Supply Voltage=5.5V, Packaging="Tape and Reel", Peak Pulse Current=30A, Pricing 1="1=0.26000, 10=0.23800, 25=0.17120, 100=0.13300, 250=0.08360, 500=0.07124, 1000=0.04845 (USD)", Radiation Hardening=No, REACH SVHC="No SVHC", RoHS=Yes, RoHS Compliant=Yes, Series=MLA, Size Code=0603, Stock 1=111737, Supplier 1=Digi-Key, Termination=SMD/SMT, Varistor Voltage=9.6V, Voltage=5.5V, Voltage Rating (AC)=4V, Voltage Rating (DC)=5.5V, Voltage Tolerance=20%, Width=0.8mm
R13 R14: library part "resistor 5.1k", "Resistor", LatestRevisionDate=17-Jul-2002, LatestRevisionNote="Re-released for DXP Platform.", PackageDescription="Axial Device, Thru-Hole; 2 Leads; 0.3 in Pin Spacing", PackageReference=AXIAL-0.3, Published=8-Jun-2000, Publisher="Altium Limited"
R15: library part "resistor 50", "Resistor", LatestRevisionDate=17-Jul-2002, LatestRevisionNote="Re-released for DXP Platform.", PackageDescription="Axial Device, Thru-Hole; 2 Leads; 0.3 in Pin Spacing", PackageReference=AXIAL-0.3, Published=8-Jun-2000, Publisher="Altium Limited"
R16 R17: library part "resistor 4.7k", "Resistor", LatestRevisionDate=17-Jul-2002, LatestRevisionNote="Re-released for DXP Platform.", PackageDescription="Axial Device, Thru-Hole; 2 Leads; 0.3 in Pin Spacing", PackageReference=AXIAL-0.3, Published=8-Jun-2000, Publisher="Altium Limited"
R23 R24: library part "resistor 75k", "Resistor", LatestRevisionDate=17-Jul-2002, LatestRevisionNote="Re-released for DXP Platform.", PackageDescription="Axial Device, Thru-Hole; 2 Leads; 0.3 in Pin Spacing", PackageReference=AXIAL-0.3, Published=8-Jun-2000, Publisher="Altium Limited"
R26 R27: library part resarray, "Resistor", LatestRevisionDate=17-Jul-2002, LatestRevisionNote="Re-released for DXP Platform.", PackageDescription="Axial Device, Thru-Hole; 2 Leads; 0.3 in Pin Spacing", PackageReference=AXIAL-0.3, Published=8-Jun-2000, Publisher="Altium Limited"
S1: "SPDT Subminiature Toggle Switch, Right Angle Mounting, Vertical Actuation", ComponentLink1Description="Manufacturer Link", ComponentLink1URL=http://www.apem.com, DatasheetVersion=05-Dec-2000, LatestRevisionDate=17-Dec-2003, LatestRevisionNote="Schematic revised, PCB Footprint replaced.", PackageDescription="Switch; 4 Leads", PackageReference=TL36WW15050, Published=24-Mar-1999, Publisher="Altium Limited"
S2 S3 S4: "Switch", LatestRevisionDate=17-Jul-2002, LatestRevisionNote="Re-released for DXP Platform.", PackageDescription="Switch; 2 Leads", PackageReference=SPST-2, Published=24-Mar-1999, Publisher="Altium Limited"
U1 U2 U7: library part TCR3UF28A,LM(CT, "LDO Regulator Positive 2.8V 300mA 5-Pin SOT-25", Manufacturer=Toshiba, Supplier Part Number 1=264-TCR3UF28ALM(CT-ND, Manufacturer Part Number=TCR3UF28A,LM(CT, Pricing 1="1=0.42000, 10=0.34400, 25=0.31440, 100=0.23400, 250=0.21212, 500=0.17554, 1000=0.13165 (USD)", RoHS=No, Stock 1=5963, Supplier 1=Digi-Key
U3: library part MCP73837-FJI/UN, "Battery Charge Controller Li-Ion/Li-Pol 1200mA 4.2V/4.35V/4.4V/4.5V 10-Pin MSOP Tube", Case/Package=MSOP, Manufacturer=Microchip, Max Operating Temperature=85°C, Max Output Current=100mA, Max Output Voltage=4.523V, Max Supply Voltage=6V, Min Operating Temperature=-40°C, Min Output Voltage=4.179V, Min Supply Voltage=3.75V, Output Current=1.2A, Output Voltage=4.5V, Package Quantity=100, Supplier Part Number 1=MCP73837-FJI/UN-ND, Category="Battery Management", ComponentLink1Description=https://datasheet.ciiva.com/15115/getdatasheetpartid-786979-15115388.pdf?src-supplier=Verical, ComponentLink1URL=https://datasheet.ciiva.com/15115/getdatasheetpartid-786979-15115388.pdf?src-supplier=Verical, ComponentLink2Description=https://datasheet.ciiva.com/1933/22071b-1933528.pdf?src-supplier=Digi-Key, ComponentLink2URL=https://datasheet.ciiva.com/1933/22071b-1933528.pdf?src-supplier=Digi-Key, Height=1.1mm, Length=3mm, Manufacturer Part Number=MCP73837-FJI/UN, Mount="Surface Mount", Number of Pins=10, Packaging=Rail/Tube, Pricing 1="1=1.38000, 25=1.14480, 100=1.03880 (USD)", Radiation Hardening=No, RoHS=Yes, RoHS Compliant=Yes, Stock 1=439, Supplier 1=Digi-Key, Width=4.9mm
U4: library part PIC24FJ64GB004T-I/PT, "16-bit MCU/DSC, 64 KB, 8192 Bytes, 32 MHz, 2 to 3.6V, TQFP-44, RoHS", Case/Package=TQFP, Frequency=32MHz, Manufacturer=Microchip, Max Operating Temperature=85°C, Max Supply Voltage=3.6V, Min Operating Temperature=-40°C, Min Supply Voltage=2V, Package Quantity=1200, Supplier Part Number 1=PIC24FJ64GB004T-I/PTCT-ND, Category=Microcontrollers, ComponentLink1Description=https://datasheet.ciiva.com/1576/39940d-1576971.pdf?src-supplier=Digi-Key, ComponentLink1URL=https://datasheet.ciiva.com/1576/39940d-1576971.pdf?src-supplier=Digi-Key, Core Architecture=PIC, Data Bus Width=16b, Interface=I2C,SPI,IrDA,UART,USB,USART, Lead Free="Lead Free", Manufacturer Part Number=PIC24FJ64GB004T-I/PT, Max Frequency=32MHz, Memory Size=64KB, Memory Type=FLASH, Mount="Surface Mount", Number of I/Os=33, Number of Pins=44, Number of Programmable I/O=33, Number of Timers/Counters=5, Oscillator Type=Internal, Packaging="Tape and Reel", Peripherals="Brown-out Detect/Reset,POR,PWM,WDT", Pricing 1="1=5.00000, 25=4.57720, 100=4.15150 (USD)", Radiation Hardening=No, RAM Size=8KB, RoHS=Yes, RoHS Compliant=Yes, Series="PIC® XLP™ 24F", Stock 1=2389, Supplier 1=Digi-Key, Watchdog Timer=Yes
U5: library part MCP1501T-20E/CHY, "V-Ref Precision 2.048V 20mA 6-Pin SOT-23 T/R", Case/Package=SOT-23-6, Manufacturer=Microchip, Max Operating Temperature=125°C, Min Operating Temperature=-40°C, Min Output Voltage=2.048V, Operating Supply Current=550uA, Output Current=20mA, Supplier Part Number 1=MCP1501T-20E/CHYCT-ND, Temperature Coefficient=50ppm/°C, Tolerance=0.1%, Category="Voltage References", ComponentLink1Description=http://www.farnell.com/datasheets/2595665.pdf?src-supplier=Farnell, ComponentLink1URL=http://www.farnell.com/datasheets/2595665.pdf?src-supplier=Farnell, ComponentLink2Description=http://www.microchip.com/mymicrochip/filehandler.aspx?ddocname=en584595&src-supplier=Digi-Key, ComponentLink2URL=http://www.microchip.com/mymicrochip/filehandler.aspx?ddocname=en584595&src-supplier=Digi-Key, Manufacturer Part Number=MCP1501T-20E/CHY, Mount="Surface Mount", Output Type=Fixed, Packaging="Tape and Reel", Pricing 1="1=0.91000, 25=0.75280, 100=0.70500 (USD)", Reference Type=Series, RoHS=Yes, RoHS Compliant=Yes, Stock 1=29051, Supplier 1=Digi-Key
U6: library part DF3D18FU,LF, "ESD Suppressor Diode TVS Bi-Dir 12V Automotive 3-Pin USM T/R", Clamping Voltage=33V, Manufacturer=Toshiba, Min Breakdown Voltage=16.2V, Peak Pulse Current=2.5A, Peak Pulse Power=80W, Power Line Protection=No, Reverse Standoff Voltage=12V, Supplier Part Number 1=DF3D18FULFCT-ND, Category="TVS Diodes", ComponentLink1Description=http://toshiba.semicon-storage.com/info/docget.jsp?did=29958&prodName=DF3D18FU&src-supplier=Digi-Key, ComponentLink1URL=http://toshiba.semicon-storage.com/info/docget.jsp?did=29958&prodName=DF3D18FU&src-supplier=Digi-Key, Manufacturer Part Number=DF3D18FU,LF, Mount="Surface Mount", Number of Bidirectional Channels=2, Packaging="Tape and Reel", Pricing 1="1=0.42000, 10=0.34100, 100=0.23230, 500=0.17424, 1000=0.13068 (USD)", RoHS=Yes, Stock 1=11057, Supplier 1=Digi-Key
U8: library part RFM95W-915S2, "Rx Txrx Module Ism < 1GHZ SMD", Case/Package=SMD/SMT, Current - Receiving=12.1mA, Current - Transmitting=120mA, Frequency=915MHz, Manufacturer="RF Solutions", Max Operating Temperature=70°C, Min Operating Temperature=-20°C, Supplier Part Number 1=RFM95W-915S2-ND, Category="RF Receivers, Transceivers", ComponentLink1Description=https://datasheet.ciiva.com/67679/1463993415rfm95-96-97-98w-67679566.pdf?src-supplier=Digi-Key, ComponentLink1URL=https://datasheet.ciiva.com/67679/1463993415rfm95-96-97-98w-67679566.pdf?src-supplier=Digi-Key, Data Rate=300Kbps, Interface=SPI, Manufacturer Part Number=RFM95W-915S2, Mount="Surface Mount", Packaging=Bulk, Pricing 1="1=13.44000 (USD)", RoHS=No, Sensitivity=-148dBm, Stock 1=355, Supplier 1=Digi-Key
U9: library part BR25G512FVT-3GE2, "EEPROM Serial-SPI 512K-bit 64K x 8 2.5V/3.3V/5V 8-Pin TSSOP-B T/R", Manufacturer=Rohm, Supplier Part Number 1=BR25G512FVT-3GE2CT-ND, Category=EEPROM, Manufacturer Part Number=BR25G512FVT-3GE2, Pricing 1="1=0.89000, 10=0.81000, 25=0.79960, 50=0.79500, 100=0.71080, 250=0.70480, 500=0.69438, 1000=0.66954 (USD)", RoHS=Yes, RoHS Compliant=Yes, Stock 1=376, Supplier 1=Digi-Key
U10: library part MC74HC541ADWG, "MC74HC541ADWG Octal Buffer & Line Driver; 3-State; 2 - 6 V; 20-Pin SOIC", Case/Package=SOIC, Current Rating=54A, High Level Output Current=-7.8mA, Low Level Output Current=7.8mA, Manufacturer="ON Semiconductor", Max Operating Temperature=125°C, Max Power Dissipation=500mW, Max Supply Voltage=6V, Min Operating Temperature=-55°C, Min Supply Voltage=2V, Package Quantity=38, Quiescent Current=4uA, Supplier Part Number 1=MC74HC541ADWGOS-ND, Category="Amplifiers - Op Amps, Buffer, Instrumentation", ComponentLink1Description=https://datasheet.ciiva.com/15094/getdatasheetpartid-72100-15094514.pdf?src-supplier=Verical, ComponentLink1URL=https://datasheet.ciiva.com/15094/getdatasheetpartid-72100-15094514.pdf?src-supplier=Verical, ComponentLink2Description=https://datasheet.ciiva.com/19477/796301-19477328.pdf?src-supplier=Jameco, ComponentLink2URL=https://datasheet.ciiva.com/19477/796301-19477328.pdf?src-supplier=Jameco, ComponentLink3Description=https://datasheet.ciiva.com/1835/mc74hc541a-d-1835370.pdf?src-supplier=Digi-Key, ComponentLink3URL=https://datasheet.ciiva.com/1835/mc74hc541a-d-1835370.pdf?src-supplier=Digi-Key, ComponentLink4Description=https://datasheet.ciiva.com/16395/mc74hc541a-d-16395608.pdf?src-supplier=Future+Electronics, ComponentLink4URL=https://datasheet.ciiva.com/16395/mc74hc541a-d-16395608.pdf?src-supplier=Future+Electronics, ComponentLink5Description=https://datasheet.ciiva.com/7970/mc74hc541a-d-7970901.pdf?src-supplier=Element14, ComponentLink5URL=https://datasheet.ciiva.com/7970/mc74hc541a-d-7970901.pdf?src-supplier=Element14, Halogen Free="Halogen Free", Height=2.4mm, Lead Free="Lead Free", Length=12.95mm, Logic Function=Buffer,Inverting,Receiver, Manufacturer Part Number=MC74HC541ADWG, Mount="Surface Mount", Number of Bits=8, Number of Bits per Element=8, Number of Channels=8, Number of Elements=1, Number of Functions=3, Number of Input Lines=8, Number of Inputs=8, Number of Output Lines=3, Number of Outputs=8, Number of Pins=20, Output Type=3-STATE, Packaging=Rail/Tube, Polarity=Non-Inverting, Pricing 1="1=0.83000, 10=0.72800, 25=0.68360, 100=0.55780, 250=0.51812, 500=0.44096, 1000=0.36400 (USD)", Propagation Delay=165ns, Radiation Hardening=No, REACH SVHC="No SVHC", RoHS=Yes, RoHS Compliant=Yes, Series=74HC, Stock 1=434, Supplier 1=Digi-Key, Supply Voltage-Nom=6V, Technology=CMOS, Turn-On Delay Time=80ns, Width=7.6mm
U11: library part MCP79411-I/MS, "Real Time Clock Serial 64byte Clock/Calendar/Alarm/Battery Backup Automotive 8-Pin MSOP Tube", Case/Package=MSOP, Manufacturer=Microchip, Max Operating Temperature=85°C, Max Supply Voltage=5.5V, Min Operating Temperature=-40°C, Min Supply Voltage=1.8V, Package Quantity=100, Supplier Part Number 1=MCP79411-I/MS-ND, Category="Real Time Clocks", ComponentLink1Description=https://datasheet.ciiva.com/8145/22266b-8145527.pdf?src-supplier=Avnet, ComponentLink1URL=https://datasheet.ciiva.com/8145/22266b-8145527.pdf?src-supplier=Avnet, ComponentLink2Description=https://datasheet.ciiva.com/6667/22266d-6667784.pdf?src-supplier=Digi-Key, ComponentLink2URL=https://datasheet.ciiva.com/6667/22266d-6667784.pdf?src-supplier=Digi-Key, ComponentLink3Description=https://datasheet.ciiva.com/17307/22266b-17307013.pdf?src-supplier=Avnet+Europe, ComponentLink3URL=https://datasheet.ciiva.com/17307/22266b-17307013.pdf?src-supplier=Avnet+Europe, ComponentLink4Description=https://datasheet.ciiva.com/15152/getdatasheetpartid-765496-15152886.pdf?src-supplier=Verical, ComponentLink4URL=https://datasheet.ciiva.com/15152/getdatasheetpartid-765496-15152886.pdf?src-supplier=Verical, Height=0.95mm, Lead Free="Lead Free", Length=3mm, Logic Function=Clock, Manufacturer Part Number=MCP79411-I/MS, Memory Size=64B, Mount="Surface Mount", Number of Pins=8, Packaging=Rail/Tube, Pricing 1="1=1.08000, 25=1.06480 (USD)", Radiation Hardening=No, RoHS=Yes, RoHS Compliant=Yes, Stock 1=16, Supplier 1=Digi-Key, Time Format=HH:MM:SS, Width=3mm
W1: "2 pin jumper", LatestRevisionDate=17-Jul-2002, LatestRevisionNote="Re-released for DXP Platform.", PackageDescription="Radial Cap, Thru-Hole; 2 Leads; 0.2 in Pin Spacing", PackageReference=RAD-0.2, Published=24-Mar-1999, Publisher="Altium Limited"
Y1: library part ECS-.327-7-12-C-TR, "Crystal 0.032768MHz ±10ppm (Tol) 7pF Flexural 90000Ohm Automotive 2-Pin Ultra Mini-CSMD T/R", Case/Package=SMD/SMT, ESR (Equivalent Series Resistance)=90kR, Frequency Tolerance=10ppm, Load Capacitance=7pF, Manufacturer="ECS International", Max Operating Temperature=85°C, Min Operating Temperature=-40°C, Supplier Part Number 1=XC2290CT-ND, Category="Crystals and Oscillators", ComponentLink1Description=https://www.ecsxtal.com/store/pdf/ECX_12.pdf?src-supplier=Digi-Key, ComponentLink1URL=https://www.ecsxtal.com/store/pdf/ECX_12.pdf?src-supplier=Digi-Key, Frequency=32.768kHz, Manufacturer Part Number=ECS-.327-7-12-C-TR, Mount="Surface Mount", Packaging="Tape and Reel", Pricing 1="1=0.89000, 10=0.78400, 50=0.73320, 100=0.64790, 500=0.61380, 1000=0.51150 (USD)", RoHS=Yes, RoHS Compliant=Yes, Stock 1=48281, Supplier 1=Digi-Key
RT1: Code_IPC=RESC2012, LatestRevisionDate=29-May-2009, LatestRevisionNote="IPC-7351 Footprint Added.", PackageDescription="Chip Resistor 0805 Case Size", PackageReference=6-0805, PackageVersion=Mar-2003, Published=24-Mar-1999, Publisher="Altium Limited"

## Free pads (board coordinates)
  round 1.524 hole 1.05: 1(94.25,4.25) 2(92.75,41.25) 3(5.75,6.75)

## Via types
v1: diameter 0.65, hole 0.35, Top Layer to Bottom Layer, 246 vias
v2: diameter 1.3, hole 0.7, Top Layer to Bottom Layer, 3 vias

## Nets (pads, with @x,y where several pads share a name; then routed paths per layer and width w, separated by ;. In a path a pad name is that pad's centre, name@x,y a point inside that pad or via, vN(x,y) a via of type N, cw(c..) or ccw(c..) an arc to the next point about the centre after c; other vN are vias at no path point)
CC1: J3.A5 R14.2 | length 8.2
  Top Layer w0.229: J3.A5 32.23,41.02 34.5,38.75 R14.2
CC2: J3.B5 R13.1 | length 10.6
  Top Layer w0.229: R13.1 28,34.5 27.5,35 27.5,38.75 29.23,40.48 J3.B5
CHGLED: D4.1 D5.1 D6.1 D7.1 | length 17.1
  Top Layer w0.254: D6.1 15.75,37.25 16.25,37.75 20.25,37.75 ; D4.1 21,39.25 21.5,38.75 21.5,37.75 ; D7.1 20.25,37.75 ; D5.1 24.75,37.25 24.25,37.75 21.5,37.75 ; 20.25,37.75 21.5,37.75
D+: J3.A6 J3.B6 U4.8 U6.2 | length 30.8
  Top Layer w0.229: v1(28.802,39.049) 30.23,40.477 J3.B6 ; J3.A6 31.23,39.134 31.5,38.864 v1(31.5,38.75)
  Top Layer w0.254: U6.2 33.4,35.85 32.25,37 32.25,38.5 32,38.75 v1(31.5,38.75) 31.5,37 36.65,31.85 U4.8
  Bottom Layer w0.254: v1(28.802,39.049) 29.757,38.095 30.845,38.095 v1(31.5,38.75)
D-: J3.A7 J3.B7 U4.9 U6.1 | length 28.3
  Top Layer w0.229: v1(30,39.25) 30.73,39.98 J3.A7 ; J3.B7 31.73,40.02 v1(32.25,39.5)
  Top Layer w0.254: v1(30,39.25) 30,37.75 35.85,31.9 U4.9 ; v1(32.25,39.5) 33,38.75 33,37.5 33.293,37.207 34.118,37.207 U6.1
  Bottom Layer w0.254: v1(30,39.25) 30.097,39.25 30.347,39.5 v1(32.25,39.5)
DBGEN: U2.3 U4.31 | length 33.1
  Top Layer w0.254: U4.31 40.595,16.025 40.595,13.762 40.75,13.607 v1(40.75,13.5) ; v1(52.5,34) 53.3,33.2 U2.3
  Bottom Layer w0.254: v1(40.75,13.5) 40.75,15.101 40.899,15.25 45.853,15.25 48.75,18.147 48.75,22 52.5,25.75 v1(52.5,34)
GND: BT1.NEG C1.1 C2.1 C3.1 C4.1 C5.1 C6.1 C7.1 C8.1 C9.2 C10.2 C11.1 C12.2 C13.1 C14.2 C18.1 C19.1 C20.2 C21.2 C22.1 C23.1 FB1.1 J1.3 J2.2 J3.A1-B12 J3.B1-A12 J3.SHELL P1.2 P1.4 P1.6 P2.2 P2.4 P2.6 P2.8 P3.2 P3.9 pad.1 pad.3 R1.2 R3.1 R5.2 R6.2 R11.2 R12.2 R13.2 R14.1 R18.1 R23.2 R24.2 R25.1 R26.1 R26.2 R26.3 R26.4 R27.1 R27.2 R27.3 R27.4 S2.1-2 U1.2 U2.2 U3.5 U3.7 U4.6 U4.16 U4.29 U4.39 U5.2 U5.3 U5.5 U6.3 U9.4 U10.1 U10.10 U10.12 U11.4
  other v1: 10.25,1.5 80.5,1.5 1.75,1.75 98.25,2 64,2.75 51.25,3 59.75,3 57,3.5 71.75,3.5 73.75,3.5 15.25,3.75 45.25,3.75 86.75,4 5.75,4.25 82.75,4.25 10.25,5 73,5 24,6 64.75,6.25 72,6.5 74,6.5 80.5,6.5 48.75,6.75 55.25,7 89.5,7.056 45.75,7.25 59.75,7.75 42,8 7.75,8.25 15.25,8.25 54.5,8.75 94.262,8.819 91.5,9 1.5,9.5 48.75,9.5 46,9.75 33.75,11.25 52,11.25 10.25,11.5 42.469,11.735 86.765,11.945 39.219,11.985 5.5,12.25 26,12.25 94.2,12.67 17,13.25 64.338,13.807 49.716,13.845 79.173,14.229 28.75,14.5 60,14.5 82.75,14.75 54.75,15.5 85.884,16.429 24.25,16.5 98.25,16.5 52.715,17.173 1.5,17.75 14.5,17.75 62.978,17.959 59.388,17.989 40.25,18.25 22.5,18.5 37,18.5 34.5,19 85.885,19.324 25.5,19.5 82.273,20.13 89.75,20.25 41.25,20.75 13.75,21.25 24.25,21.75 47.25,21.75 17.5,22.75 63.587,22.993 98.25,23.25 59,23.5 65.028,23.496 8.477,23.738 14.5,23.75 85.859,23.768 53.25,24 66.398,24.015 1.5,24.5 35.25,24.5 56.5,24.5 67.762,24.762 28.25,25 70.75,25.5 37.75,25.75 49,26.5 29.135,27.038 43.5,27.75 54.25,28.25 27.5,29 62.45,29.037 59,29.75 11.75,30.5 34.25,30.5 7.25,31 22.236,31.127 57.5,32 69.25,32 1.5,32.25 49,32.75 39.64,32.957 27.5,33 31.876,33.239 45,33.25 36.541,33.26 18.011,33.289 64.75,33.5 57.75,34.75 3.5,35 7.75,35 36.5,35 11.75,35.25 53,35.75 17.728,36.865 29,37 41.964,37.233 3.5,38.25 48.25,38.25 52.5,38.25 11.5,38.5 14.982,38.739 26.5,39 40.538,39.078 8.75,42 1.5,42.25 35.75,42.5 21.25,42.75 26.5,42.75 40,44 64.25,44.75 48.75,46.25 51.75,46.25 61.5,46.25 13,48.25 22.5,48.25 1.5,48.5 39,48.75 66,48.75 46.25,49 55.75,49 63,49
INT0: R20.2 U4.43 U10.9 | length 63.9
  Top Layer w0.254: U4.43@43.945,24.975 U4.43 45.95,24.95 v1(47.25,26.25) ; v1(58.25,38.75) 59.055,37.945 U10.9 59.055,34.445 65,28.5 69.5,28.5 72.921,25.079 76.035,25.079 81.207,19.906 81.207,16.543 81.75,16 84,16 84.5,16.5 R20.2
  Bottom Layer w0.254: v1(47.25,26.25) 51.5,30.5 51.5,35.75 54.5,38.75 v1(58.25,38.75)
INT1: R22.1 U4.11 U10.8 | length 118.7
  Top Layer w0.254: U4.11 34.25,24.25 v1(36.75,21.75) ; U10.8 60.325,33.925 65.293,28.957 69.689,28.957 73.111,25.536 76.224,25.536 77.26,24.5 89.25,24.5 90.5,23.25 90.5,19 91.25,18.25 92.25,18.25 92.5,18 R22.1 v1(92.5,15.5)
  Bottom Layer w0.254: v1(36.75,21.75) 38.538,19.962 38.538,14.212 40,12.75 50.5,12.75 55,17.25 89.25,17.25 91,15.5 v1(92.5,15.5)
LED-INT0: D16.1 U10.19 | length 15.2
  Top Layer w0.254: U10.19 68,26.695 68,25.5 69.336,24.164 75.336,24.164 78.5,21 D16.1
LED-INT1: D17.1 U10.20 | length 22.7
  Top Layer w0.254: U10.20 69.215,25.535 70.128,24.622 75.845,24.622 80.75,19.717 D17.1
LED-MCLK: D15.1 U10.18 | length 21.5
  Top Layer w0.254: U10.18 66.675,24.801 67.769,23.707 72.793,23.707 76.25,20.25 D15.1
LED-SCL: D13.1 U10.16 | length 20.7
  Top Layer w0.254: U10.16 64.135,23.365 64.75,22.75 69.75,22.75 71.75,20.75 D13.1
LED-SCLK: D14.1 U10.17 | length 14.3
  Top Layer w0.254: U10.17 65.405,24.095 65.743,23.757 65.743,23.744 66.127,23.36 66.14,23.36 66.25,23.25 72,23.25 74,21.25 D14.1
LED-VBAT: D11.1 U10.15 | length 12.9
  Top Layer w0.254: U10.15 62.865,22.635 63.25,22.25 68,22.25 69.5,20.75 D11.1
LED-VREG: D9.1 U10.13 | length 10.3
  Top Layer w0.254: U10.13 60.325,23.675 62.75,21.25 64.5,21.25 65,20.75 D9.1
LED-VRF: D10.1 U10.14 | length 18.5
  Top Layer w0.254: U10.14 61.595,23.155 63,21.75 65.75,21.75 67.25,20.25 D10.1
MCLR: J1.1 R4.1 U4.18 | length 27.8
  Top Layer w0.254: R4.1 11.25,20 12.5,18.75 J1.1 15.04,16.29 16.25,17.5 26.5,17.5 29.945,20.945 32.575,20.945 U4.18
MEMCLK: U4.5 U9.6 U10.7 | length 32.9
  Top Layer w0.254: U4.5 39.05,30.8 44.325,36.075 U9.6 44.301,36.974 44.301,38.449 v1(44.25,38.5) ; v1(60.75,38.75) 61.595,37.905 U10.7
  Bottom Layer w0.254: v1(44.25,38.5) 45.25,39.5 60,39.5 v1(60.75,38.75)
MEMCS: U4.3 U9.1 | length 7.5
  Top Layer w0.254: U4.3 40.65,30.9 42,32.25 42.75,32.25 43.001,31.999 43.001,31.074 U9.1
MEMDI: U4.2 U9.2 | length 5.3
  Top Layer w0.254: U4.2 41.45,28.95 42,29.5 43.25,29.5 43.675,29.925 U9.2